# Altium PCB PCB1.PcbDoc (part 1 of 3)
Units mm, origin at the board's own origin, x right, y up, seen from the top; angles counter-clockwise.
Board outline 152.4 x 101.6 mm, 2 copper layers (Top Layer, Bottom Layer); 246 components, 0 nets, 683 pads, 311 vias.
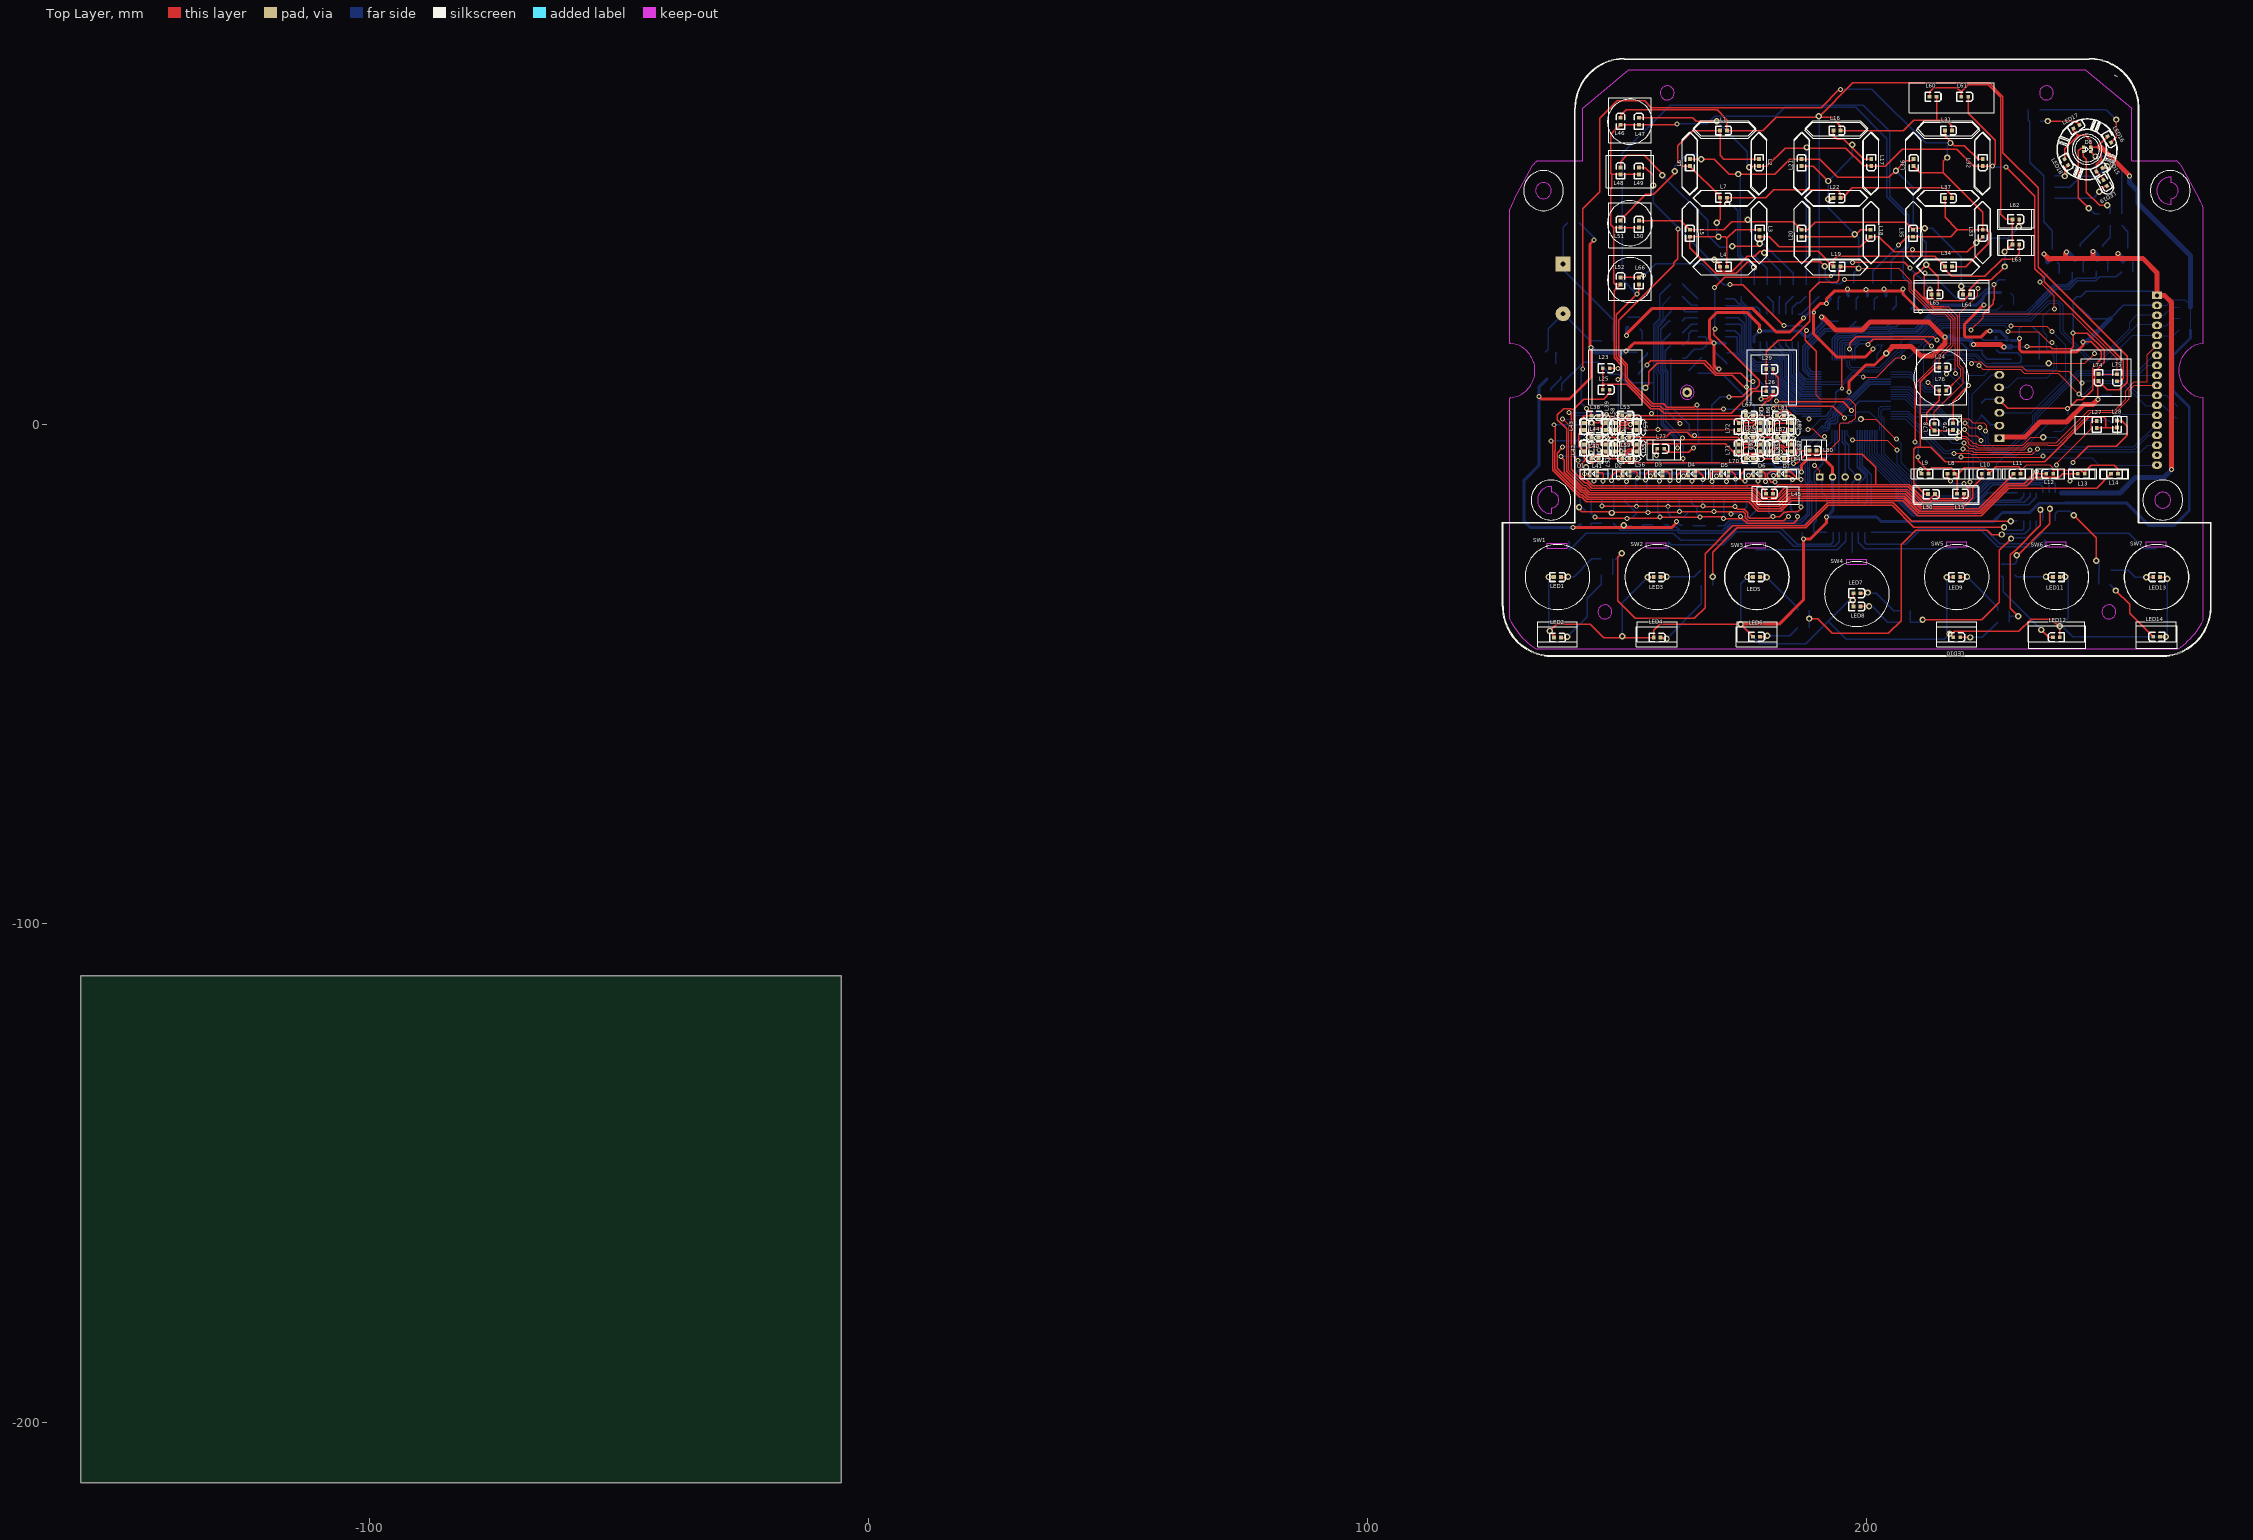
[diagram p0: Top Layer view]
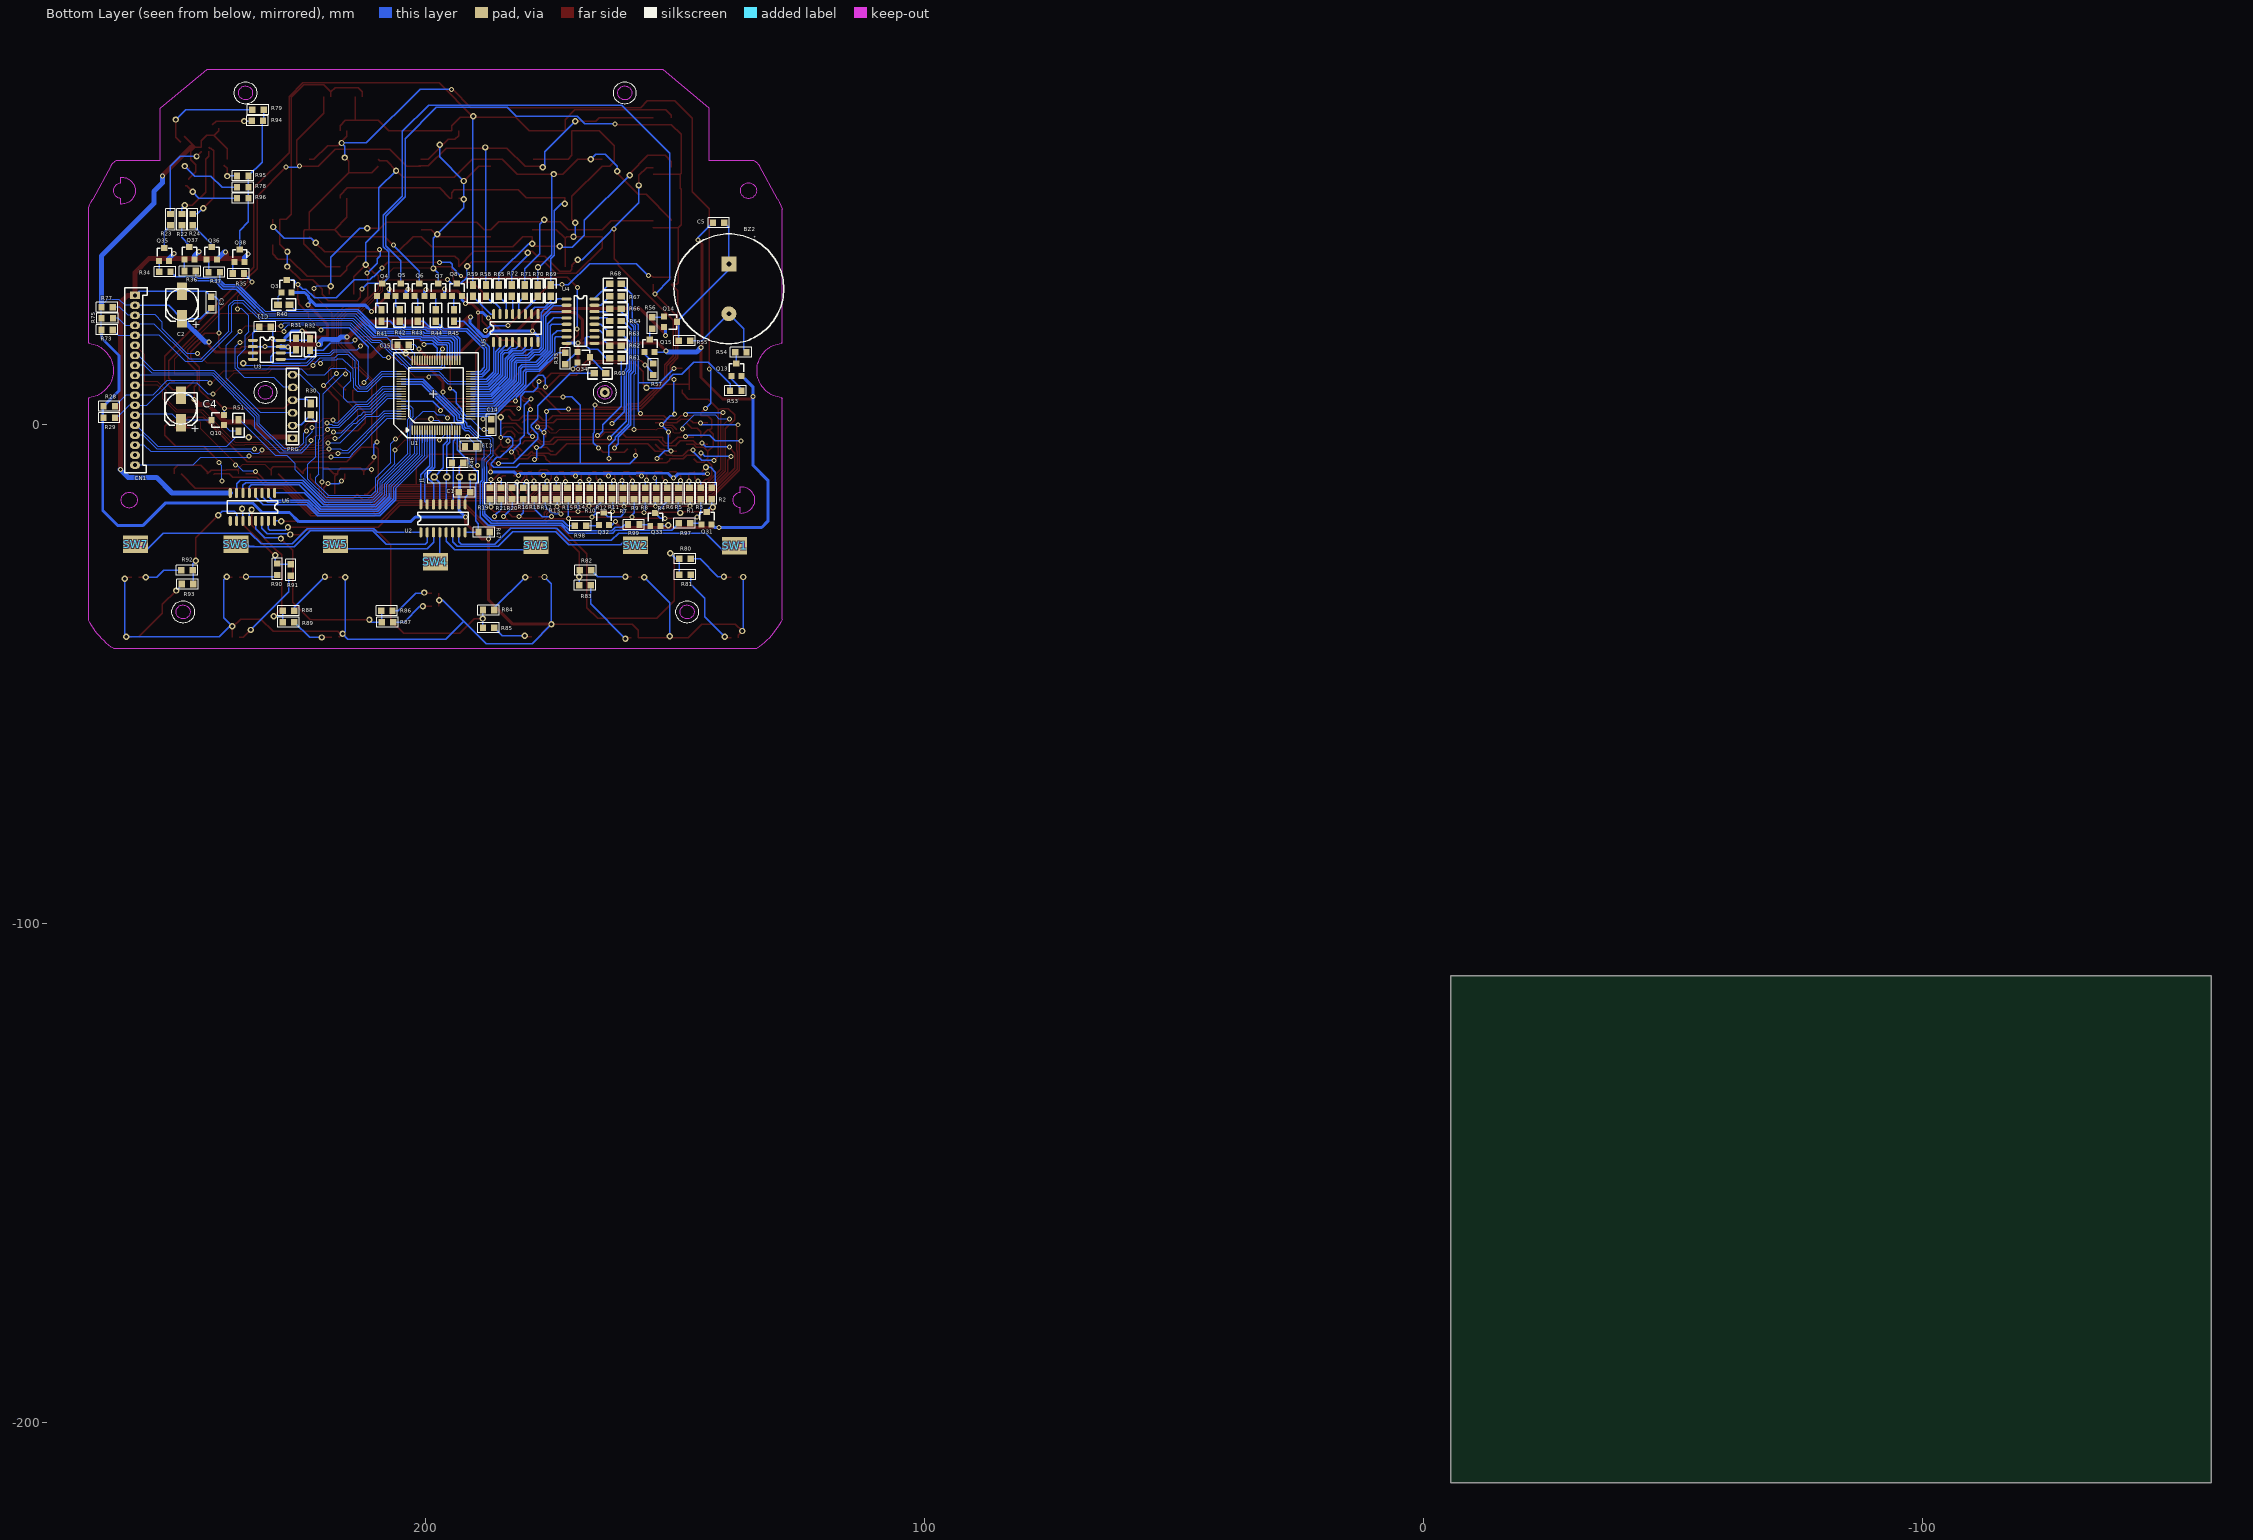
[diagram p1: Bottom Layer view, seen from below]

## Layer stack, top to bottom
Top Layer: signal copper 0.0356
Dielectric: dielectric 0.32, FR-4, Dk 4.8
Bottom Layer: signal copper 0.0356

## Board outline
-157.999,-212.076 -5.599,-212.076 -5.599,-110.476 -157.999,-110.476

## Design rules (kind name [scope] priority, off if disabled: settings)
Clearance [All] p1: gap=0.254
PolygonConnect [All] p1: connectstyle=Relief reliefconductorwidth=0.254 reliefentries=4 polygonreliefangle="90 Angle"
RoutingVias [All] p1: holewidth=0.711 width=1.27 viastyle="Through Hole" minholewidth=0.711 minwidth=1.27 maxholewidth=0.711 maxwidth=1.27
SilkscreenOverComponentPads [All] p1: minsilkscreentomaskgap=0.254
SolderMaskExpansion [All] p1: expansion=0.102
Width [All] p1: maxlimit=0.254 minlimit=0.254 preferedwidth=0.254
27 further rules are at their usual default settings.

## Components (designator, comment, footprint, x,y, rotation, side; value= is the part's Value field where it differs from the comment)
BZ2 "BEEP" BUZ 139.118,27.161 r270 bottom
C1 "104" 0805A 190.934,-13.606 r0 bottom
C2 "220uF/16V" cap_smd_6.3mm 248.719,21.142 r0 bottom
C3 "104" 0805A 242.864,25.592 r270 bottom
C4 "220uF/16V" cap_smd_6.3mm 248.934,0.319 r0 bottom
C5 "106" 0805A 142.293,40.369 r180 bottom
C11 "104" 0805A 233.225,19.505 r180 bottom
C13 "105" 0805A 191.988,-4.431 r180 bottom
C14 "104" 0805A 186.704,-1.256 r90 bottom
C15 "104" 0805A 205.526,15.914 r180 bottom
CN1 "Header 18" 18PIN-2.0mm 258.117,8.823 r270 bottom
D1 "Header 4" LED-1615-2 145.214,-9.923 r0 top
D2 "Header 4" LED-1615-2 151.786,-9.921 r0 top
D3 "Header 4" LED-1615-2 158.358,-9.921 r0 top
D4 "Header 4" LED-1615-2 164.93,-9.921 r0 top
D5 "Header 4" LED-1615-2 171.503,-9.921 r0 top
D6 "Header 4" LED-1615-2 177.98,-9.921 r0 top
D7 "Header 4" LED-1615-2 183.06,-9.921 r0 top
D8 "Header 4" LED-1615-2 244.105,55.102 r180 top
J1 "Header 4" HDR1X4 190.553,-10.558 r0 bottom
L1 "0805" LED_0603 171.249,58.875 r0 top
L2 "0805" LED_0603 178.361,52.44 r270 top
L3 "0805" LED_0603 178.488,38.301 r270 top
L4 "0805" LED_0603 171.249,31.57 r180 top
L5 "0805" LED_0603 164.52,38.301 r90 top
L6 "0805" LED_0603 164.52,52.44 r90 top
L7 "0805" LED_0603 171.249,45.413 r0 top
L8 "0805" LED_0603 216.829,-9.921 r180 top
L9 "0805" LED_0603 211.622,-9.921 r180 top
L10 "0805" LED_0603 223.687,-9.921 r180 top
L11 "0805" LED_0603 230.088,-9.921 r180 top
L12 "0805" LED_0603 236.615,-9.921 r180 top
L13 "0805" LED_0603 242.94,-9.921 r180 top
L14 "0805" LED_0603 249.595,-9.921 r180 top
L15 "0805" LED_0603 218.747,-13.91 r0 top
L16 "0805" LED_0603 193.984,58.875 r0 top
L17 "0805" LED_0603 200.84,52.44 r270 top
L18 "0805" LED_0603 200.713,38.301 r270 top
L19 "0805" LED_0603 193.984,31.612 r180 top
L20 "0805" LED_0603 186.872,38.301 r90 top
L21 "0805" LED_0603 186.872,52.44 r90 top
L22 "0805" LED_0603 193.984,45.328 r0 top
L23 "0805" LED_0603 147.754,11.25 r0 top
L24 "0805" LED_0603 215.191,11.377 r0 top
L25 "0805" LED_0603 147.754,6.932 r0 top
L26 "0805" LED_0603 180.532,6.643 r0 top
L27 "0805" LED_0603 246.064,-0.037 r90 top
L28 "0805" LED_0603 250.103,0.039 r90 top
L29 "0805" LED_0603 180.532,11.063 r0 top
L30 "0805" LED_0603 212.905,-13.987 r0 top
L31 "0805" LED_0603 216.336,58.875 r0 top
L32 "0805" LED_0603 223.192,52.44 r270 top
L33 "0805" LED_0603 223.192,38.287 r270 top
L34 "0805" LED_0603 216.336,31.612 r180 top
L35 "0805" LED_0603 209.224,38.301 r90 top
L36 "0805" LED_0603 209.349,52.44 r90 top
L37 "0805" LED_0603 216.336,45.328 r0 top
L38 "0805" LED_0603 145.471,1.726 r0 top
L39 "0805" LED_0603 147.624,-0.429 r270 top
L40 "0805" LED_0603 147.624,-4.736 r270 top
L41 "0805" LED_0603 145.471,-6.91 r180 top
L42 "0805" LED_0603 143.317,-4.736 r90 top
L43 "0805" LED_0603 143.317,-0.429 r90 top
L44 "0805" LED_0603 145.471,-2.581 r0 top
L45 "" LED_0603 180.456,-13.905 r0 top
L46 "0805" LED_0603 150.611,60.72 r90 top
L47 "0805" LED_0603 154.294,60.72 r90 top
L48 "0805" LED_0603 150.611,50.789 r90 top
L49 "0805" LED_0603 154.294,50.763 r90 top
L50 "0805" LED_0603 154.294,40.121 r90 top
L51 "0805" LED_0603 150.611,40.121 r90 top
L52 "0805" LED_0603 150.611,28.741 r90 top
L53 "0805" LED_0603 151.671,1.726 r0 top
L54 "0805" LED_0603 153.824,-0.429 r270 top
L55 "0805" LED_0603 153.824,-4.736 r270 top
L56 "0805" LED_0603 151.671,-6.91 r180 top
L57 "0805" LED_0603 149.531,-4.736 r90 top
L58 "0805" LED_0603 149.531,-0.429 r90 top
L59 "0805" LED_0603 151.671,-2.581 r0 top
L60 "0805" LED_0603 213.247,65.648 r0 top
L61 "0805" LED_0603 219.597,65.648 r0 top
L62 "0805" LED_0603 229.834,41.06 r0 top
L63 "0805" LED_0603 229.834,36.006 r0 top
L64 "0805" LED_0603 219.928,26.024 r180 top
L65 "0805" LED_0603 213.628,26.024 r0 top
L66 "0805" LED_0603 154.294,28.741 r90 top
L67 "0805" LED_0603 176.471,1.725 r0 top
L68 "0805" LED_0603 178.625,-0.429 r270 top
L69 "0805" LED_0603 178.625,-4.736 r270 top
L70 "0805" LED_0603 176.471,-6.911 r180 top
L71 "0805" LED_0603 174.318,-4.736 r90 top
L72 "0805" LED_0603 174.318,-0.429 r90 top
L73 "0805" LED_0603 176.471,-2.582 r0 top
L74 "0805" LED_0603 246.394,9.361 r270 top
L75 "0805" LED_0603 250.116,9.345 r270 top
L76 "0805" LED_0603 215.191,6.805 r0 top
L77 "0805" LED_0603 158.676,-4.879 r0 top
L78 "0805" LED_0603 213.501,-0.57 r90 top
L79 "0805" LED_0603 217.261,-0.469 r90 top
L80 "0805" LED_0603 189.156,-5.274 r0 top
L81 "0805" LED_0603 182.671,1.725 r0 top
L82 "0805" LED_0603 184.825,-0.429 r270 top
L83 "0805" LED_0603 184.825,-4.736 r270 top
L84 "0805" LED_0603 182.671,-6.889 r180 top
L85 "0805" LED_0603 180.518,-4.736 r90 top
L86 "0805" LED_0603 180.52,-0.429 r90 top
L87 "0805" LED_0603 182.671,-2.582 r0 top
LED1 "" LED_0603 137.975,-30.609 r0 top
LED2 "" LED_0603 137.975,-42.725 r0 top
LED3 "" LED_0603 157.95,-30.609 r0 top
LED4 "" LED_0603 157.95,-42.725 r0 top
LED5 "" LED_0603 177.875,-30.609 r0 top
LED6 "" LED_0603 177.875,-42.556 r0 top
LED7 "" LED_0603 197.975,-33.835 r0 top
LED8 "" LED_0603 197.975,-36.502 r0 top
LED9 "" LED_0603 217.975,-30.609 r0 top
LED10 "" LED_0603 217.975,-42.689 r0 top
LED11 "" LED_0603 237.95,-30.609 r180 top
LED12 "" LED_0603 237.95,-42.689 r180 top
LED13 "" LED_0603 258.05,-30.609 r180 top
LED14 "" LED_0603 258.05,-42.562 r180 top
LED15 "" LED_0603 246.56,51.001 r30 top
LED16 "" LED_0603 248.592,57.097 r300 top
LED17 "" LED_0603 241.988,59.637 r30 top
LED18 "" LED_0603 239.956,52.525 r300 top
LED19 "" LED_0603 247.703,48.37 r300 top
PRG "" prg-6p 226.532,-2.78 r270 bottom
Q3 "8550" SOT-23N 228.741,26.405 r180 bottom
Q4 "8550" SOT-23N 209.615,25.693 r180 bottom
Q5 "8550" SOT-23N 205.869,25.693 r180 bottom
Q6 "8550" SOT-23N 202.122,25.693 r180 bottom
Q7 "8550" SOT-23N 198.376,25.693 r180 bottom
Q8 "8550" SOT-23N 194.629,25.693 r180 bottom
Q10 "8550" SOT-23N 240.273,-0.164 r90 bottom
Q13 "8050" SOT-23N 138.61,9.635 r180 bottom
Q14 "8550" SOT-23N 152.072,21.573 r270 bottom
Q15 "8050" SOT-23N 156.009,14.461 r180 bottom
Q31 "8050" SOT-23N 144.579,-20.083 r180 bottom
Q32 "8050" SOT-23N 165.153,-20.21 r180 bottom
Q33 "8050" SOT-23N 154.866,-20.337 r180 bottom
Q34 "8050" SOT-23N 169.471,14.461 r270 bottom
Q35 "8050" SOT-23N 253.291,32.749 r180 bottom
Q36 "8050" SOT-23N 243.766,33.003 r180 bottom
Q37 "8050" SOT-23N 248.211,33.003 r180 bottom
Q38 "8050" SOT-23N 238.178,32.495 r180 bottom
R1 "1K" 0805A 146.992,-15.003 r90 bottom
R2 "1K" 0805A 142.547,-15.003 r90 bottom
R3 "1K" 0805A 144.769,-15.003 r90 bottom
R4 "1K" 0805A 153.659,-15.003 r90 bottom
R5 "1K" 0805A 149.214,-15.003 r90 bottom
R6 "1K" 0805A 151.437,-15.003 r90 bottom
R7 "1K" 0805A 160.327,-15.003 r90 bottom
R8 "1K" 0805A 155.882,-15.003 r90 bottom
R9 "1K" 0805A 158.104,-15.003 r90 bottom
R10 "1K" 0805A 166.994,-15.003 r90 bottom
R11 "1K" 0805A 162.549,-15.003 r90 bottom
R12 "1K" 0805A 164.772,-15.003 r90 bottom
R13 "1K" 0805A 173.662,-15.003 r90 bottom
R14 "1K" 0805A 169.217,-15.003 r90 bottom
R15 "1K" 0805A 171.439,-15.003 r90 bottom
R16 "1K" 0805A 180.329,-15.003 r90 bottom
R17 "1K" 0805A 175.884,-15.003 r90 bottom
R18 "1K" 0805A 178.107,-15.003 r90 bottom
R19 "1K" 0805A 186.997,-15.003 r90 bottom
R20 "1K" 0805A 182.552,-15.003 r90 bottom
R21 "1K" 0805A 184.774,-15.003 r90 bottom
R22 "1K" 0805A 248.719,39.861 r90 bottom
R23 "1K" 0805A 251.005,39.861 r90 bottom
R24 "1K" 0805A 246.56,39.861 r90 bottom
R28 "10K" 0805a 264.428,3.621 r180 bottom
R29 "10K" 0805a 264.428,1.335 r180 bottom
R30 "10K" 0805 222.874,1.894 r90 bottom
R31 "10K" 0805 225.859,14.933 r90 bottom
R32 "10K" 0805 223.065,14.842 r90 bottom
R33 "4.7K" 0805a 171.884,12.048 r90 bottom
R34 "4.7K" 0805a 253.291,30.59 r180 bottom
R35 "4.7K" 0805a 238.559,30.209 r180 bottom
R36 "4.7K" 0805a 248.211,30.717 r180 bottom
R37 "4.7K" 0805a 243.385,30.463 r180 bottom
R40 "4.7K" 0805 229.453,23.992 r180 bottom
R41 "4.7K" 0805 208.726,22.976 r270 bottom
R42 "4.7K" 0805 205.094,22.976 r270 bottom
R43 "4.7K" 0805 201.462,22.976 r270 bottom
R44 "4.7K" 0805 197.83,22.976 r270 bottom
R45 "4.7K" 0805 194.197,22.976 r270 bottom
R46 "10K" 0805a 192.318,-7.733 r0 bottom
R47 "10K" 0805a 187.009,-21.601 r0 bottom
R51 "4.7K" 0805 237.377,0.928 r270 bottom
R53 "4.7K" 0805a 136.59,6.72 r0 bottom
R54 "100R" 0805a 135.562,14.461 r0 bottom
R55 "1K" 0805a 149.151,16.747 r180 bottom
R56 "1K" 0805a 154.485,21.446 r270 bottom
R57 "4.7K" 0805a 154.243,12.181 r270 bottom
R58 "470R" 0805 187.792,27.923 r270 bottom
R59 "470R" 0805 190.39,27.923 r270 bottom
R60 "470R" 0805 166.08,10.225 r180 bottom
R61 "470R" 0805 160.708,13.258 r0 bottom
R62 "470R" 0805 160.708,15.739 r0 bottom
R63 "470R" 0805 160.708,18.219 r0 bottom
R64 "470R" 0805 160.708,20.7 r0 bottom
R65 "470R" 0805 185.195,27.923 r270 bottom
R66 "470R" 0805 160.708,23.18 r0 bottom
R67 "470R" 0805 160.708,25.661 r0 bottom
R68 "470R" 0805 160.708,28.141 r0 bottom
R69 "470R" 0805 174.805,27.923 r270 bottom
R70 "470R" 0805 177.402,27.923 r270 bottom
R71 "470R" 0805 180,27.923 r270 bottom
R72 "470R" 0805 182.597,27.923 r270 bottom
R73 "10K" 0805a 264.835,18.912 r180 bottom
R75 "10K" 0805a 264.822,21.233 r180 bottom
R77 "10K" 0805a 264.835,23.484 r180 bottom
R78 "Res1" 0805A 237.67,47.481 r180 bottom
R79 "Res1" 0805A 234.622,63.052 r180 bottom
R80 "Res1" 0805A 146.738,-26.941 r0 bottom
R81 "Res1" 0805A 146.738,-30.166 r0 bottom
R82 "Res1" 0805A 166.677,-29.227 r0 bottom
R83 "Res1" 0805A 166.804,-32.275 r0 bottom
R84 "Res1" 0805A 186.108,-37.228 r0 bottom
R85 "Res1" 0805A 186.108,-40.784 r0 bottom
R86 "Res1" 0805A 206.519,-37.355 r0 bottom
R87 "Res1" 0805A 206.392,-39.641 r0 bottom
R88 "Res1" 0805A 226.204,-37.355 r0 bottom
R89 "Res1" 0805A 226.204,-39.641 r0 bottom
R90 "Res1" 0805A 229.605,-30.187 r90 bottom
R91 "Res1" 0805A 226.887,-30.314 r90 bottom
R92 "Res1" 0805A 248.846,-29.227 r180 bottom
R93 "Res1" 0805A 248.719,-32.021 r180 bottom
R94 "Res1" 0805A 234.749,60.816 r180 bottom
R95 "Res1" 0805A 237.67,49.767 r180 bottom
R96 "Res1" 0805A 237.67,45.322 r180 bottom
R97 "4.7K" 0805a 146.865,-19.829 r0 bottom
R98 "4.7K" 0805a 167.693,-20.337 r0 bottom
R99 "4.7K" 0805a 157.025,-20.083 r0 bottom
SW1 "TOUCH" SPRING1 137.975,-24.324 r90 top
SW2 "TOUCH" spring1 157.787,-24.197 r90 top
SW3 "TOUCH" spring1 177.726,-24.197 r90 top
SW4 "TOUCH" spring1 197.919,-27.499 r90 top
SW5 "TOUCH" spring1 217.985,-24.07 r90 top
SW6 "TOUCH" spring1 237.924,-24.07 r90 top
SW7 "TOUCH" spring1 257.99,-24.07 r90 top
U1 "78F0485" 78F0485 197.792,5.825 r0 bottom
U2 "BS83B08A-3" SO-16 200.84,-21.643 r90 bottom
U3 "24c02" SO-8 234.495,16.838 r180 bottom
U4 "ULN2003" SO-16 171.63,25.129 r180 bottom
U5 "ULN2003" SO-16 186.247,16.499 r90 bottom
U6 "ULN2003" SO-16 230.138,-13.753 r270 bottom

## Footprints (in the part's own frame and the unit in brackets; to place one, negate y for a bottom-side part, rotate by r counter-clockwise, add the part's x,y. Pads: shape width x height; smd on the part's side, far side on the other; paste and mask are expansions set on the pad)
18PIN-2.0mm [mm]
  rect 1.5x2 hole 0.8: 1(-17,0)
  oval 1.5x2 hole 0.8: 2(-15,0) 3(-13,0) 4(-11,0) 5(-9,0) 6(-7,0) 7(-5,0) 8(-3,0) 9(-1,0) 10(1,0) 11(3,0) 12(5,0) 13(7,0) 14(9,0) 15(11,0) 16(13,0) 17(15,0) 18(17,0)
  silkscreen extent -18.52,-2.03 18.54,2.54
78F0485 [mm]
  oval 0.25x1.9 smd: 1(4.75,7) 2(4.25,7) 3(3.75,7) 4(3.25,7) 5(2.75,7) 6(2.25,7) 7(1.75,7) 8(1.25,7) 9(0.75,7) 10(0.25,7) 11(-0.25,7) 12(-0.75,7) 13(-1.25,7) 14(-1.75,7) 15(-2.25,7) 16(-2.75,7) 17(-3.25,7) 18(-3.75,7) 19(-4.25,7) 20(-4.75,7) 41(-4.75,-7) 42(-4.25,-7) 43(-3.75,-7) 44(-3.25,-7) 45(-2.75,-7) 46(-2.25,-7) 47(-1.75,-7) 48(-1.25,-7) 49(-0.75,-7) 50(-0.25,-7) 51(0.25,-7) 52(0.75,-7) 53(1.25,-7) 54(1.75,-7) 55(2.25,-7) 56(2.75,-7) 57(3.25,-7) 58(3.75,-7) 59(4.25,-7) 60(4.75,-7)
  oval 1.9x0.25 smd: 21(-7,4.75) 22(-7,4.25) 23(-7,3.75) 24(-7,3.25) 25(-7,2.75) 26(-7,2.25) 27(-7,1.75) 28(-7,1.25) 29(-7,0.75) 30(-7,0.25) 31(-7,-0.25) 32(-7,-0.75) 33(-7,-1.25) 34(-7,-1.75) 35(-7,-2.25) 36(-7,-2.75) 37(-7,-3.25) 38(-7,-3.75) 39(-7,-4.25) 40(-7,-4.75) 61(7,-4.75) 62(7,-4.25) 63(7,-3.75) 64(7,-3.25) 65(7,-2.75) 66(7,-2.25) 67(7,-1.75) 68(7,-1.25) 69(7,-0.75) 70(7,-0.25) 71(7,0.25) 72(7,0.75) 73(7,1.25) 74(7,1.75) 75(7,2.25) 76(7,2.75) 77(7,3.25) 78(7,3.75) 79(7,4.25) 80(7,4.75)
  silkscreen extent -8.5,-8.5 8.5,8.5
0805 [mil]
  rect 60x50 smd: 1(0,0) 2(90,0)
  silkscreen extent -50,-45 140,45
0805A [mm]
  rect 1.27x1.35 smd: 1(0,0) 2(2.286,0)
  silkscreen extent -1,-1 3.3,1
0805a [mm]
  rect 1.27x1.35 smd: 1(0,0) 2(2.286,0)
  silkscreen extent -1,-1 3.3,1
BUZ [mm]
  rect 3x3 hole 1: 1(-5.003,0)
  round 3 hole 1: 2(5.003,0)
  silkscreen extent -11,-11 11,11
cap_smd_6.3mm [mm]
  rect 2x3.5 smd: 1(0,0) 2(0,-5.5)
  silkscreen extent -3.25,-6 3.25,0.5
HDR1X4 [mm]
  rect 1.5x1.5 hole 0.9: 1(0,0)
  round 1.5 hole 0.9: 2(2.54,0) 3(5.08,0) 4(7.62,0)
  silkscreen extent -1.27,-1.27 8.89,1.27
LED-1615-2 [mm]
  rect 0.65x0.65 smd: 1(-0.725,0.425) 2(0.725,0.425) 3(-0.725,-0.425) 4(0.725,-0.425)
  silkscreen extent -1.12,-0.47 0.22,0.48
LED_0603 [mil]
  rect 30x30 smd: 1(-27.5,0) 2(27.5,0)
  silkscreen extent -62,-35 62,35
prg-6p [mm]
  rect 1.5x2 hole 1: 1(0,0)
  oval 1.5x2 hole 1: 2(-2.54,0) 3(-5.08,0) 4(-7.62,0) 5(-10.16,0.049) 6(-12.7,0)
  silkscreen extent -13.97,-1.27 1.27,1.27
SO-8 [mil]
  oval 80x24 smd: 1(0,0) 2(0,-50) 3(0,-100) 4(0,-150) 5(220,-150) 6(220,-100) 7(220,-50) 8(220,0)
  silkscreen extent 60,-175 160,25
SO-16 [mil]
  oval 80x24 smd: 1(0,0) 2(0,-50) 3(0,-100) 4(0,-150) 5(0,-200) 6(0,-250) 7(0,-300) 8(0,-350) 9(220,-350) 10(220,-300) 11(220,-250) 12(220,-200) 13(220,-150) 14(220,-100) 15(220,-50) 16(220,0)
  silkscreen extent 60,-375 160,25
SOT-23N [mm]
  rect 1.2x1.2 smd: 1(0,0) 3(2.032,0.006)
  rect 1.3x1.2 smd: 2(1.008,2.543)
  silkscreen extent -0.4,0.9 2.5,2.5
SPRING1 [mm]
  rect 3.5x5 smd far side: 1(0,0)
  Keep-Out Layer lines w0.127: -0.5,2 -0.5,-2 0.5,-2 0.5,2 -0.5,2
spring1 [mm]
  rect 3.5x5 smd far side: 1(0,0)
  Keep-Out Layer lines w0.127: -0.5,2 -0.5,-2 0.5,-2 0.5,2 -0.5,2

## Part data
BZ2: library part BELL, "Bell"
C1 C3 C5 C11 C13 C14 C15: library part Cap, "Capacitor"
C2 C4: library part ELECTRO2, "Electrolytic Capacitor"
CN1: "Header, 18-Pin"
D1 D2 D3 D4 D5 D6 D7 D8 J1: "Header, 4-Pin"
L1 L2 L3 L4 L5 L6 L7 L8 L9 L10 L11 L12 L13 L14 L15 L16 L17 L18 L19 L20 L21 L22 L23 L24 L25 L26 L27 L28 L29 L30 L31 L32 L33 L34 L35 L36 L37 L38 L39 L40 L41 L42 L43 L44 L45 L46 L47 L48 L49 L50 L51 L52 L53 L54 L55 L56 L57 L58 L59 L60 L61 L62 L63 L64 L65 L66 L67 L68 L69 L70 L71 L72 L73 L74 L75 L76 L77 L78 L79 L80 L81 L82 L83 L84 L85 L86 L87 LED1 LED2 LED3 LED4 LED5 LED6 LED7 LED8 LED9 LED10 LED11 LED12 LED13 LED14 LED15 LED16 LED17 LED18 LED19: library part LED0, "Typical INFRARED GaAs LED"
PRG: library part CON6, "Connector"
Q3 Q4 Q5 Q6 Q7 Q8 Q10 Q14: library part PNP, "PNP Transistor"
Q13 Q15 Q31 Q32 Q33 Q34 Q35 Q36 Q37 Q38: library part NPN, "NPN Transistor"
R1 R2 R3 R4 R5 R6 R7 R8 R9 R10 R11 R12 R13 R14 R15 R16 R17 R18 R19 R20 R21 R22 R23 R24 R28 R29 R30 R31 R32 R33 R34 R35 R36 R37 R40 R41 R42 R43 R44 R45 R46 R47 R51 R53 R54 R55 R56 R57 R58 R59 R60 R61 R62 R63 R64 R65 R66 R67 R68 R69 R70 R71 R72 R73 R75 R77 R97 R98 R99: library part Res1, "Resistor"
R78 R79 R80 R81 R82 R83 R84 R85 R86 R87 R88 R89 R90 R91 R92 R93 R94 R95 R96: "Resistor"
U3: library part 24CXX

## Free pads (board coordinates)
  round 2 hole 1: 0(163.975,6.41) 0(163.975,6.41)

## Via types
v1: diameter 1, hole 0.6, Top Layer to Bottom Layer, 214 vias
v2: diameter 1.27, hole 0.711, Top Layer to Bottom Layer, 93 vias
v3: diameter 0.8, hole 0.4, Top Layer to Bottom Layer, 3 vias
v4: diameter 1, hole 0.5, Top Layer to Bottom Layer, 1 vias

## Nets (pads, with @x,y where several pads share a name; then routed paths per layer and width w, separated by ;. In a path a pad name is that pad's centre, name@x,y a point inside that pad or via, vN(x,y) a via of type N, cw(c..) or ccw(c..) an arc to the next point about the centre after c; other vN are vias at no path point)
pads on no net: BZ2.1 BZ2.2 C1.1 C1.2 C2.1 C2.2 C3.1 C3.2 C4.1 C4.2 C5.1 C5.2 C11.1 C11.2 C13.1 C13.2 C14.1 C14.2 C15.1 C15.2 CN1.1 CN1.2 CN1.3 CN1.4 CN1.5 CN1.6 CN1.7 CN1.8 CN1.9 CN1.10 CN1.11 CN1.12 CN1.13 CN1.14 CN1.15 CN1.16 CN1.17 CN1.18 D1.1 D1.2 D1.3 D1.4 D2.1 D2.2 D2.3 D2.4 D3.1 D3.2 D3.3 D3.4 D4.1 D4.2 D4.3 D4.4 D5.1 D5.2 D5.3 D5.4 D6.1 D6.2 D6.3 D6.4 D7.1 D7.2 D7.3 D7.4 D8.1 D8.2 D8.3 D8.4 J1.1 J1.2 J1.3 J1.4 L1.1 L1.2 L2.1 L2.2 L3.1 L3.2 L4.1 L4.2 L5.1 L5.2 L6.1 L6.2 L7.1 L7.2 L8.1 L8.2 L9.1 L9.2 L10.1 L10.2 L11.1 L11.2 L12.1 L12.2 L13.1 L13.2 L14.1 L14.2 L15.1 L15.2 L16.1 L16.2 L17.1 L17.2 L18.1 L18.2 L19.1 L19.2 L20.1 L20.2 L21.1 L21.2 L22.1 L22.2 L23.1 L23.2 L24.1 L24.2 L25.1 L25.2 L26.1 L26.2 L27.1 L27.2 L28.1 L28.2 L29.1 L29.2 L30.1 L30.2 L31.1 L31.2 L32.1 L32.2 L33.1 L33.2 L34.1 L34.2 L35.1 L35.2 L36.1 L36.2 L37.1 L37.2 L38.1 L38.2 L39.1 L39.2 L40.1 L40.2 L41.1 L41.2 L42.1 L42.2 L43.1 L43.2 L44.1 L44.2 L45.1 L45.2 L46.1 L46.2 L47.1 L47.2 L48.1 L48.2 L49.1 L49.2 L50.1 L50.2 L51.1 L51.2 L52.1 L52.2 L53.1 L53.2 L54.1 L54.2 L55.1 L55.2 L56.1 L56.2 L57.1 L57.2 L58.1 L58.2 L59.1 L59.2 L60.1 L60.2 L61.1 L61.2 L62.1 L62.2 L63.1 L63.2 L64.1 L64.2 L65.1 L65.2 L66.1 L66.2 L67.1 L67.2 L68.1 L68.2 L69.1 L69.2 L70.1 L70.2 L71.1 L71.2 L72.1 L72.2 L73.1 L73.2 L74.1 L74.2 L75.1 L75.2 L76.1 L76.2 L77.1 L77.2 L78.1 L78.2 L79.1 L79.2 L80.1 L80.2 L81.1 L81.2 L82.1 L82.2 L83.1 L83.2 L84.1 L84.2 L85.1 L85.2 L86.1 L86.2 L87.1 L87.2 LED1.1 LED1.2 LED2.1 LED2.2 LED3.1 LED3.2 LED4.1 LED4.2 LED5.1 LED5.2 LED6.1 LED6.2 LED7.1 LED7.2 LED8.1 LED8.2 LED9.1 LED9.2 LED10.1 LED10.2 LED11.1 LED11.2 LED12.1 LED12.2 LED13.1 LED13.2 LED14.1 LED14.2 LED15.1 LED15.2 LED16.1 LED16.2 LED17.1 LED17.2 LED18.1 LED18.2 LED19.1 LED19.2 PRG.1 PRG.2 PRG.3 PRG.4 PRG.5 PRG.6 Q3.1 Q3.2 Q3.3 Q4.1 Q4.2 Q4.3 Q5.1 Q5.2 Q5.3 Q6.1 Q6.2 Q6.3 Q7.1 Q7.2 Q7.3 Q8.1 Q8.2 Q8.3 Q10.1 Q10.2 Q10.3 Q13.1 Q13.2 Q13.3 Q14.1 Q14.2 Q14.3 Q15.1 Q15.2 Q15.3 Q31.1 Q31.2 Q31.3 Q32.1 Q32.2 Q32.3 Q33.1 Q33.2 Q33.3 Q34.1 Q34.2 Q34.3 Q35.1 Q35.2 Q35.3 Q36.1 Q36.2 Q36.3 Q37.1 Q37.2 Q37.3 Q38.1 Q38.2 Q38.3 R1.1 R1.2 R2.1 R2.2 R3.1 R3.2 R4.1 R4.2 R5.1 R5.2 R6.1 R6.2 R7.1 R7.2 R8.1 R8.2 R9.1 R9.2 R10.1 R10.2 R11.1 R11.2 R12.1 R12.2 R13.1 R13.2 R14.1 R14.2 R15.1 R15.2 R16.1 R16.2 R17.1 R17.2 R18.1 R18.2 R19.1 R19.2 R20.1 R20.2 R21.1 R21.2 R22.1 R22.2 R23.1 R23.2 R24.1 R24.2 R28.1 R28.2 R29.1 R29.2 R30.1 R30.2 R31.1 R31.2 R32.1 R32.2 R33.1 R33.2 R34.1 R34.2 R35.1 R35.2 R36.1 R36.2 R37.1 R37.2 R40.1 R40.2 R41.1 R41.2 R42.1 R42.2 R43.1 R43.2 R44.1 R44.2 R45.1 R45.2 R46.1 R46.2 R47.1 R47.2 R51.1 R51.2 R53.1 R53.2 R54.1 R54.2 R55.1 R55.2 R56.1 R56.2 R57.1 R57.2 R58.1 R58.2 R59.1 R59.2 R60.1 R60.2 R61.1 R61.2 R62.1 R62.2 R63.1 R63.2 R64.1 R64.2 R65.1 R65.2 R66.1 R66.2 R67.1 R67.2 R68.1 R68.2 R69.1 R69.2 R70.1 R70.2 R71.1 R71.2 R72.1 R72.2 R73.1 R73.2 R75.1 R75.2 R77.1 R77.2 R78.1 R78.2 R79.1 R79.2 R80.1 R80.2 R81.1 R81.2 R82.1 R82.2 R83.1 R83.2 R84.1 R84.2 R85.1 R85.2 R86.1 R86.2 R87.1 R87.2 R88.1 R88.2 R89.1 R89.2 R90.1 R90.2 R91.1 R91.2 R92.1 R92.2 R93.1 R93.2 R94.1 R94.2 R95.1 R95.2 R96.1 R96.2 R97.1 R97.2 R98.1 R98.2 R99.1 R99.2 SW1.1 SW2.1 SW3.1 SW4.1 SW5.1 SW6.1 SW7.1 U1.1 U1.2 U1.3 U1.4 U1.5 U1.6 U1.7 U1.8 U1.9 U1.10 U1.11 U1.12 U1.13 U1.14 U1.15 U1.16 U1.17 U1.18 U1.19 U1.20 U1.21 U1.22 U1.23 U1.24 U1.25 U1.26 U1.27 U1.28 U1.29 U1.30 U1.31 U1.32 U1.33 U1.34 U1.35 U1.36 U1.37 U1.38 U1.39 U1.40 U1.41 U1.42 U1.43 U1.44 U1.45 U1.46 U1.47 U1.48 U1.49 U1.50 U1.51 U1.52 U1.53 U1.54 U1.55 U1.56 U1.57 U1.58 U1.59 U1.60 U1.61 U1.62 U1.63 U1.64 U1.65 U1.66 U1.67 U1.68 U1.69 U1.70 U1.71 U1.72 U1.73 U1.74 U1.75 U1.76 U1.77 U1.78 U1.79 U1.80 U2.1 U2.2 U2.3 U2.4 U2.5 U2.6 U2.7 U2.8 U2.9 U2.10 U2.11 U2.12 U2.13 U2.14 U2.15 U2.16 U3.1 U3.2 U3.3 U3.4 U3.5 U3.6 U3.7 U3.8 U4.1 U4.2 U4.3 U4.4 U4.5 U4.6 U4.7 U4.8 U4.9 U4.10 U4.11 U4.12 U4.13 U4.14 U4.15 U4.16 U5.1 U5.2 U5.3 U5.4 U5.5 U5.6 U5.7 U5.8 U5.9 U5.10 U5.11 U5.12 U5.13 U5.14 U5.15 U5.16 U6.1 U6.2 U6.3 U6.4 U6.5 U6.6 U6.7 U6.8 U6.9 U6.10 U6.11 U6.12 U6.13 U6.14 U6.15 U6.16